# Altium PCB 2110V3.1.PcbDoc
Units mil, origin at the board's own origin, x right, y up, seen from the top; angles counter-clockwise.
Board outline 4100 x 2625 mil, 2 copper layers (Top Layer, Bottom Layer); 54 components, 23 nets, 148 pads, 12 vias.
Unrouted connection lines stored in the file: 2.
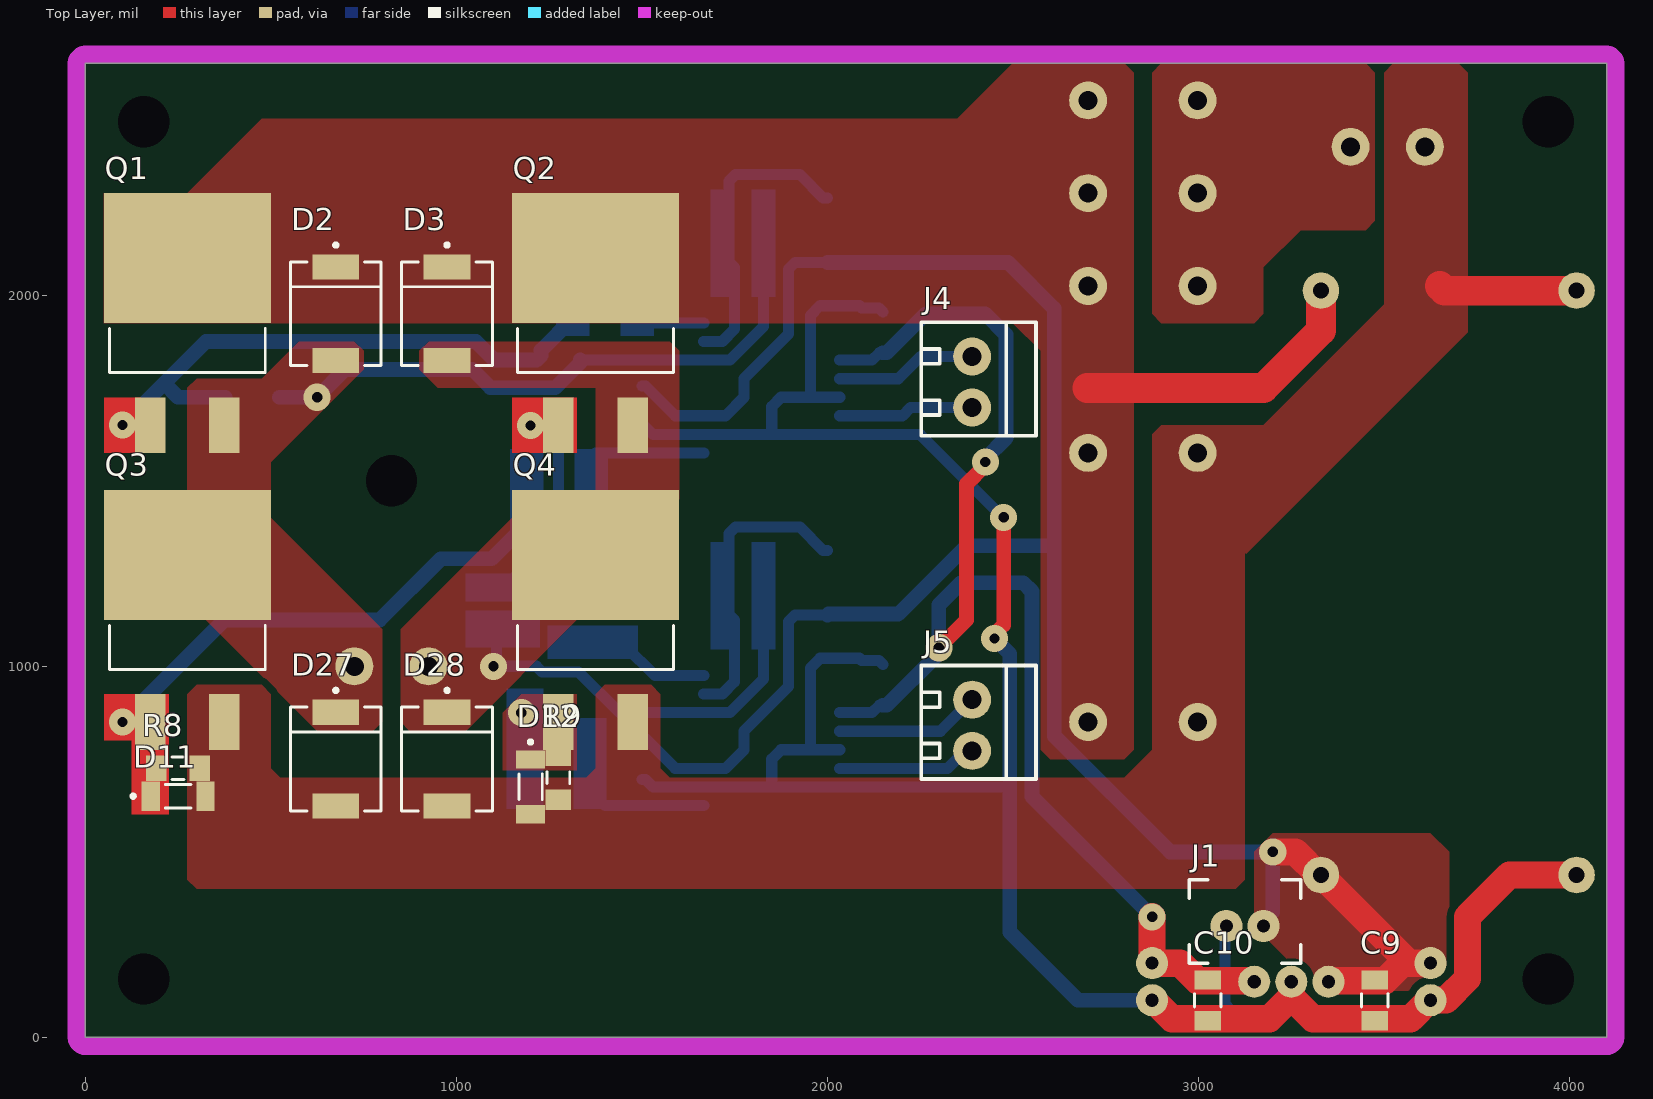
[diagram p0: Top Layer view]
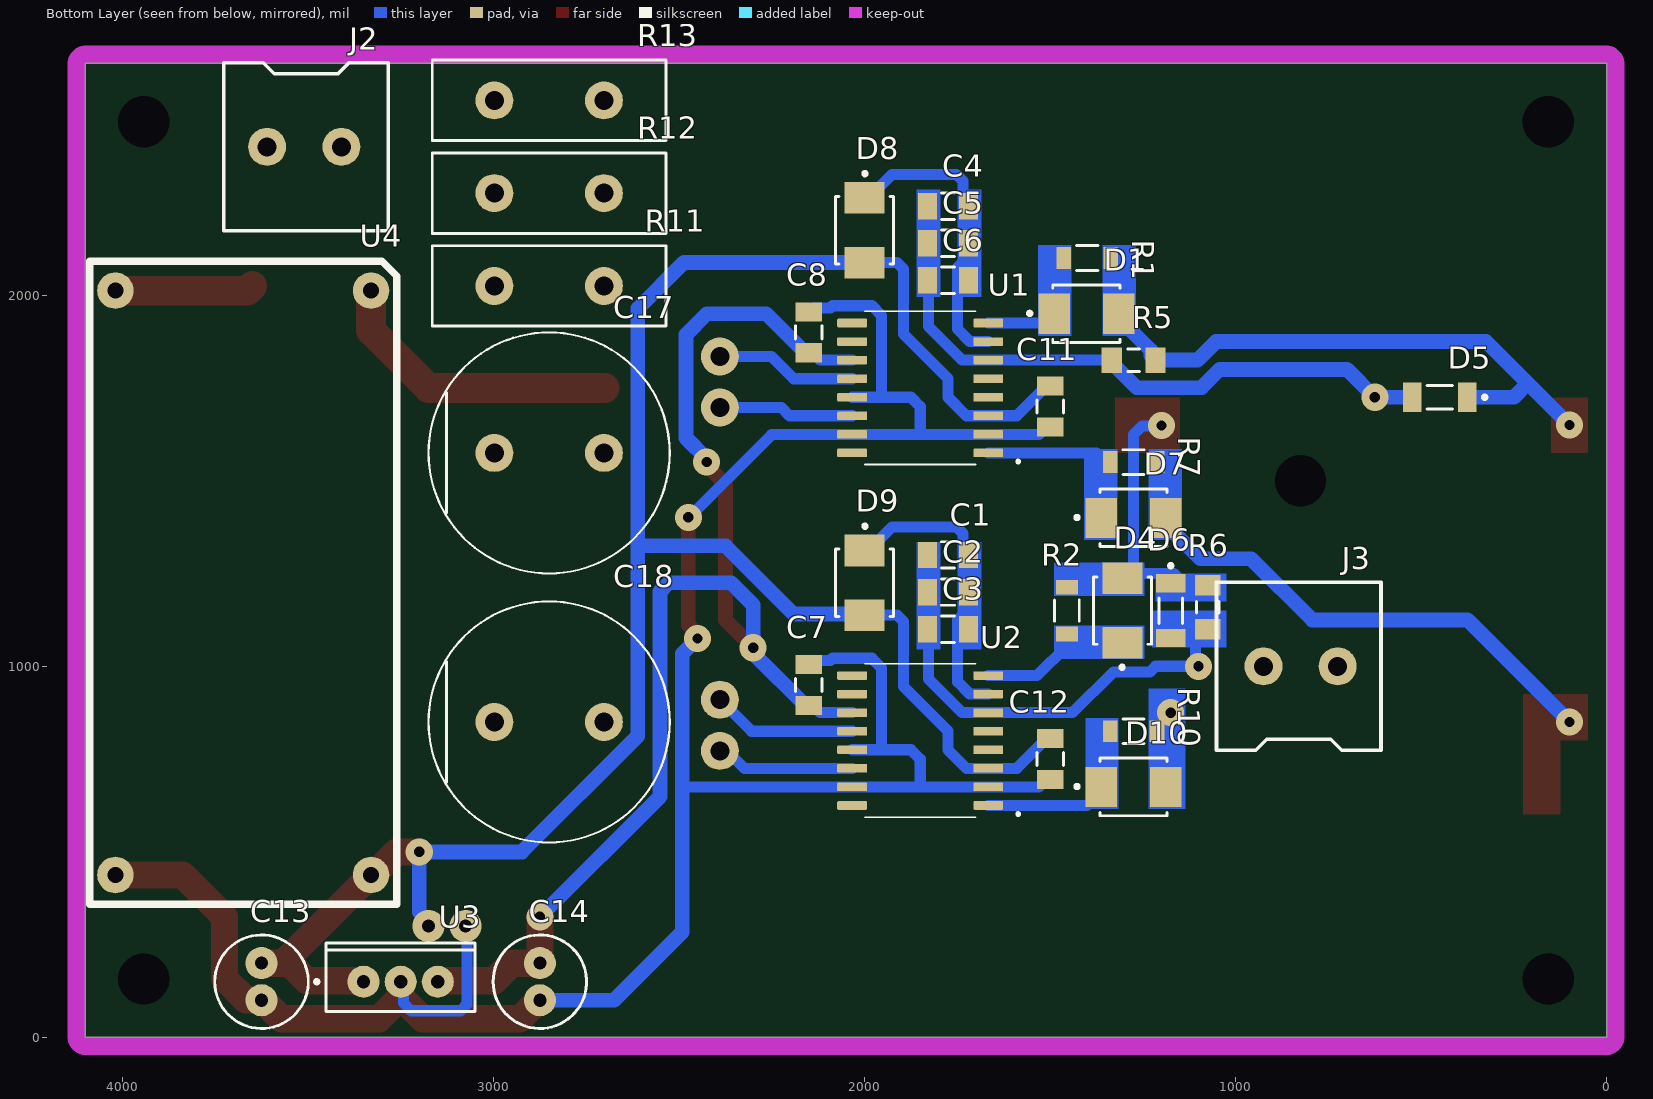
[diagram p1: Bottom Layer view, seen from below]

## Layer stack, top to bottom
Top Solder: solder mask 0.4, Solder Resist, Dk 3.5
Top Layer: signal copper 1.4
Dielectric 1: dielectric 12.6, FR-4, Dk 4.8
Bottom Layer: signal copper 1.4
Bottom Solder: solder mask 0.4, Solder Resist, Dk 3.5

## Board outline
0,0 0,2625 4100,2625 4100,0

## Design rules (kind name [scope] priority, off if disabled: settings)
Clearance [All] p1: gap=20 ignorepadtopadclearanceinfootprint=TRUE except(0: Arc-Hole Track-Hole SMDPad-Hole THPad-Hole Via-Hole Fill-Hole Poly-Hole Region-Hole Text-Hole)
Height [All] p1: minheight=0 maxheight=80000 prefheight=0
PolygonConnect [All] p1: connectstyle=Direct reliefconductorwidth=10 reliefentries=4 polygonreliefangle="90 Angle" airgapwidth=10
RoutingVias [All] p1: holewidth=28 width=50 viastyle="Through Hole" minholewidth=28 minwidth=50 maxholewidth=28 maxwidth=50
SolderMaskExpansion [All] p1: expansion=4 istentingtop=FALSE
Width [All] p1: maxlimit=600 minlimit=10 preferedwidth=30 minimp=50.000000 maximp=50.000000 favimp=50.000000
29 further rules are at their usual default settings.

## Components (designator, comment, footprint, x,y, rotation, side; value= is the part's Value field where it differs from the comment)
C1 "12061C474KAT2A" FP-1206-L_3_2_0_2-W_1_6_0-IPC_B 1775,1300 r0 bottom
C2 "12061C474KAT2A" FP-1206-L_3_2_0_2-W_1_6_0-IPC_B 1775,1200 r0 bottom
C3 "12061C474KAT2A" FP-1206-L_3_2_0_2-W_1_6_0-IPC_B 1775,1100 r0 bottom
C4 "12061C474KAT2A" FP-1206-L_3_2_0_2-W_1_6_0-IPC_B 1775,2240 r0 bottom
C5 "12061C474KAT2A" FP-1206-L_3_2_0_2-W_1_6_0-IPC_B 1775,2140 r0 bottom
C6 "12061C474KAT2A" FP-1206-L_3_2_0_2-W_1_6_0-IPC_B 1775,2040 r0 bottom
C7 "12065C104KAT2A" FP-1206-L_3_2_0_2-W_1_6_0-IPC_B 2150,950 r90 bottom
C8 "12065C104KAT2A" FP-1206-L_3_2_0_2-W_1_6_0-IPC_B 2150,1900 r90 bottom
C9 "12065C104KAT2A" FP-1206-L_3_2_0_2-W_1_6_0-IPC_B 3475,100 r270 top
C10 "12065C104KAT2A" FP-1206-L_3_2_0_2-W_1_6_0-IPC_B 3025,100 r270 top
C11 "12065C104KAT2A" FP-1206-L_3_2_0_2-W_1_6_0-IPC_B 1500,1700 r270 bottom
C12 "12065C104KAT2A" FP-1206-L_3_2_0_2-W_1_6_0-IPC_B 1500,750 r270 bottom
C13 "22 uF TH Electrolytic Capacitor" "22 uF TH Electrolytic Capacitor-Footprint-1" 3625,150 r270 bottom
C14 "22 uF TH Electrolytic Capacitor" "22 uF TH Electrolytic Capacitor-Footprint-1" 2875,150 r270 bottom
C17 "ECA1VM222" FP-RAD-TH-D_16_0_5-L_25_2-MFG 2850,1575 r180 bottom
C18 "ECA1VM222" FP-RAD-TH-D_16_0_5-L_25_2-MFG 2850,850 r180 bottom
D1 "MURS120T3G" FP-403A-03-MFG 1402.36,1950 r180 bottom
D2 "SS34-E3/57T" FP-95402-MFG 675,1950 r270 top
D3 "SS34-E3/57T" FP-95402-MFG 975,1950 r270 top
D4 "MURS120T3G" FP-403A-03-MFG 1305,1150 r90 bottom
D5 "TZMC3V3-GS08" FP-6_560-5005_01-4-MFG 450,1725 r0 bottom
D6 "TZMC3V3-GS08" FP-6_560-5005_01-4-MFG 1175,1150 r270 bottom
D7 "MURS120T3G" FP-403A-03-MFG 1275,1400 r180 bottom
D8 "MURS120T3G" FP-403A-03-MFG 2000,2175 r270 bottom
D9 "MURS120T3G" FP-403A-03-MFG 2000,1225 r270 bottom
D10 "MURS120T3G" FP-403A-03-MFG 1275,675 r180 bottom
D11 "TZMC3V3-GS08" FP-6_560-5005_01-4-MFG 250,650 r0 top
D12 "TZMC3V3-GS08" FP-6_560-5005_01-4-MFG 1200,675 r270 top
D27 "SS34-E3/57T" FP-95402-MFG 675,750 r270 top
D28 "SS34-E3/57T" FP-95402-MFG 975,750 r270 top
J1 "JST-2.54mm-2pin" "New footprint 1"#1 3125,300 r180 top
J2 "2 pin terminal klemens" "New footprint 1"#2 3509.84,2400 r0 bottom
J3 "2 pin terminal klemens" "New footprint 1"#2 825,1000 r180 bottom
J4 "KF350-P2" "New footprint 1"#3 2400,1775 r270 top
J5 "KF350-P2" "New footprint 1"#3 2400,850 r270 top
Q1 "IRF3205STRLPBF" FP-PG-TO263-3-MFG 275,1981.4 r0 top
Q2 "IRF3205STRLPBF" FP-PG-TO263-3-MFG 1375,1981.4 r0 top
Q3 "IRF3205STRLPBF" FP-PG-TO263-3-MFG 275,1181.4 r0 top
Q4 "IRF3205STRLPBF" FP-PG-TO263-3-MFG 1375,1181.4 r0 top
R1 "RC1206JR-0710RL" FP-RC1206-0_65-MFG 1400,2100 r180 bottom
R2 "RC1206JR-0710RL" FP-RC1206-0_65-MFG 1455,1150 r90 bottom
R5 "Resistor 1k +/-1% 1206 250 mW" RESC3116X70X50ML13T20 1275,1825 r0 bottom value=1k
R6 "Resistor 1k +/-1% 1206 250 mW" RESC3116X70X50ML13T20 1075,1159.06 r270 bottom value=1k
R7 "RC1206JR-0710RL" FP-RC1206-0_65-MFG 1275,1550 r180 bottom
R8 "Resistor 1k +/-1% 1206 250 mW" RESC3116X70X50ML13T20 250,725 r0 top value=1k
R9 "Resistor 1k +/-1% 1206 250 mW" RESC3116X70X50ML13T20 1275,700 r270 top value=1k
R10 "RC1206JR-0710RL" FP-RC1206-0_65-MFG 1275,825 r180 bottom
R11 "20mm Body 7.5mm pitch Thermistor" FP-NTPAD-MFG 2850,2025 r180 bottom
R12 "20mm Body 7.5mm pitch Thermistor" FP-NTPAD-MFG 2850,2275 r180 bottom
R13 "20mm Body 7.5mm pitch Thermistor" FP-NTPAD-MFG 2850,2525 r180 bottom
U1 "IR2110SPBF" IR2110SPBF-Footprint-1 1850,1750 r0 bottom
U2 "IR2110SPBF" IR2110SPBF-Footprint-1 1850,800 r0 bottom
U3 "LM7805CT" FAIR-TO-220-3 3250,150 r90 bottom
U4 "LM2596 Buck Converter Module" "LM2596 Buck Converter Module-Footprint-1" 3674.43,1225 r270 bottom

## Footprints (in the part's own frame and the unit in brackets; to place one, negate y for a bottom-side part, rotate by r counter-clockwise, add the part's x,y. Pads: shape width x height; smd on the part's side, far side on the other; paste and mask are expansions set on the pad)
"22 uF TH Electrolytic Capacitor-Footprint-1" [mm]
  round 2.2 hole 0.9 mask+0.051: 1(-1.27,0) 2(1.27,0)
  silkscreen extent -3.2,-3.2 3.2,3.2, body extent -3.15,-3.15 3.16,3.15, height 11.01
FAIR-TO-220-3 [mm] "FM, 3-Leads, Body 10.2x4.7mm, Pitch 2.54mm"
  round 2.2 hole 0.9 mask+0.051: 1(0,2.54) 2(0,0) 3(0,-2.54)
  silkscreen extent -2.04,-5.1 2.66,5.88, body extent -2.04,-5.1 2.66,5.1, height 18.95
FP-6_560-5005_01-4-MFG [mm]
  rect 1.25x2 smd paste+0 mask+0: 1(-1.875,0) 2(1.875,0)
  silkscreen extent -3.2,-0.8 0.87,0.8, body extent -1.76,-0.8 1.74,0.8, height 1.59
FP-403A-03-MFG [mil]
  rect 85x107.99 smd paste+0 mask+0: 1(-87.01,0) 2(87.01,0)
  silkscreen extent -157,-78 91,78, body extent -107,-70 107,70, height 97
FP-1206-L_3_2_0_2-W_1_6_0-IPC_B [mil]
  rect 51.36x71.11 smd paste+0 mask+0: 1(-55.15,0) 2(55.15,0)
  silkscreen extent -18,-36 18,36, body extent -63,-31 63,31, height 70
FP-95402-MFG [mm]
  rect 1.72x3.2 smd paste+0 mask+0: 1(-3.205,0) 2(3.205,0)
  silkscreen extent -4.82,-3.11 3.55,3.11, body extent -4.17,-3.21 4.17,3.21, height 0.25
FP-NTPAD-MFG [mm]
  round 2.6 hole 1.3 mask+0.051: 1(-3.75,0) 2(3.75,0)
  silkscreen extent -8,-2.75 8,2.75, body extent -8,-2.75 8,2.75, height 26
FP-PG-TO263-3-MFG [mm]
  rect 2.08x3.81 smd paste+0 mask+0: 1(-2.54,-8.417) 3(2.54,-8.417)
  rect 11.43x8.89 smd paste+0 mask+0: 2(0,3.013)
  silkscreen extent -5.34,-4.82 5.34,-1.81, body extent -5.81,-10.42 5.81,7.56, height 0.25
FP-RAD-TH-D_16_0_5-L_25_2-MFG [mm]
  round 2.6 hole 1.3 mask+0.051: 1(-3.75,0) 2(3.75,0)
  silkscreen extent -8.25,-8.25 8.25,8.25, body extent -8,-8.01 7.99,7.99, height 27
FP-RC1206-0_65-MFG [mm]
  rect 1x1.5 smd paste+0 mask+0: 1(-1.6,0) 2(1.6,0)
  silkscreen extent -0.72,-0.85 0.72,0.85, body extent -1.6,-0.79 1.62,0.81, height 0.57
IR2110SPBF-Footprint-1 [mm]
  rrect25% 2.05x0.59 smd: 1(-4.655,4.445) 2(-4.655,3.175) 3(-4.655,1.905) 4(-4.655,0.635) 5(-4.655,-0.635) 6(-4.655,-1.905) 7(-4.655,-3.175) 8(-4.655,-4.445) 9(4.655,-4.445) 10(4.655,-3.175) 11(4.655,-1.905) 12(4.655,-0.635) 13(4.655,0.635) 14(4.655,1.905) 15(4.655,3.175) 16(4.655,4.445)
  silkscreen extent -6.8,-5.25 3.8,5.25
"LM2596 Buck Converter Module-Footprint-1" [mm]
  round 2.5 hole 1.1 mask+0.051: 1(-20,8.75) 2(-20,-8.75) 3(20,8.75) 4(20,-8.75)
  silkscreen extent -22,-10.5 22,10.5, body extent -21.5,-10.5 21.5,10.5, height 13.82
"New footprint 1"#1 [mm]
  round 2.2 hole 0.9 mask+0.051: 1(-1.27,0) 2(1.27,0)
  silkscreen extent -3.81,-3.18 3.81,2.54, body extent -3.79,-3.15 3.75,2.55, height 7
"New footprint 1"#2 [mm]
  round 2.6 hole 1.3 mask+0.051: 1(-2.54,0) 2(2.54,0)
  silkscreen extent -5.75,-5.75 5.5,5.75, body extent -5.5,-5.6 5.23,5.6, height 19.34
"New footprint 1"#3 [mm]
  round 2.6 hole 1.3 mask+0.051: 1(-1.524,-0.254) 2(1.976,-0.254)
  silkscreen extent -3.86,-3.73 3.91,4.11, body extent -3.67,-3.6 3.73,3.9, height 10
RESC3116X70X50ML13T20 [mm] "Chip Resistor, 2-Leads, Body 3.25x1.65mm, IPC Low Density"
  rect 1.4x1.75 smd: 1(-1.5,0) 2(1.5,0)
  silkscreen extent -0.4,-0.77 0.4,0.77, body extent -1.63,-0.82 1.63,0.82, height 0.7

## Part data
C1 C2 C3 C4 C5 C6: library part CMP-000013-1, "1206 470 nF 100 V ±10 % Tolerance X7R Surface Mount Multilayer Ceramic Capacitor"
C7 C8 C9 C10 C11 C12: library part CMP-001-00084-1, "Ceramic capacitor SMD-1206 100nF /50V X7R# K +-10%, AVX, RoHS, /4000 reel/"
C13 C14: library part CMP-000003-2
C17 C18: library part CMP-000011-3, "Cap Aluminum 2200uF 35V 20% (16 X 25mm) Radial 7.5mm 1250mA 2000h 85°C Bulk"
D1 D4 D7 D8 D9 D10: library part CMP-004-00033-1, "VR=200V IF=2A Trr=35ns"
D2 D3 D27 D28: library part CMP-000005-2, "DIODE SCHOTTKY 40V 3A DO214AB"
D5 D6 D11 D12: library part CMP-000009-1, "DIODE ZENER 3.3V 500MW SOD80"
J1: library part CMP-000001-1, "2 pin konnektör"
J2 J3: library part CMP-002-00072-2, "2 pin terminal klemens pin aralığı 200 mil"
J4 J5: library part CMP-002-00078-2, "3.5mm mini klemens"
Q1 Q2 Q3 Q4: library part CMP-013-00038-1, "MOSFET N-CH 55V 110A D2PAK"
R1 R2 R7 R10: library part CMP-000008-1, "Res General Purpose Thick Film 1206 10 Ohm 5% 1/4W ±200ppm/°C Molded SMD Paper T/R"
R5 R6 R8 R9: library part CMP-009-00011-5, "Chip Resistor, 1 KOhm, +/- 1%, 0.25 W, -55 to 155 degC, 1206 (3216 Metric)", Case/Package=1206, Max Operating Temperature=155°C, Min Operating Temperature=-55°C, Power=250mW, Tolerance=1%, Voltage Rating=200V, Mounting Technology=SM, Pins=2, RoHS Compliant=True
R11 R12 R13: library part CMP-009-00184-2
U1 U2: library part CMP-000016-1, "500 V high-side and low-side gate driver IC with shutdown, SOIC 16W, RoHS"
U3: library part CMP-000017-2, "LM78XX Series 5 V Fixed Output 1 A 3-Terminal LDO Voltage Regulator - TO-220"
U4: library part CMP-00000-1

## Free pads (board coordinates)
  round 60 hole 137.8: 1(157.48,157.48) 1(157.48,2467.52) 1(825,1500) 1(3942.52,157.48) 1(3942.52,2467.52)

## Via types
v1: diameter 72.87, hole 27.56, Top Layer to Bottom Layer, 12 vias

## Nets (pads, with @x,y where several pads share a name; then routed paths per layer and width w, separated by ;. In a path a pad name is that pad's centre, name@x,y a point inside that pad or via, vN(x,y) a via of type N, cw(c..) or ccw(c..) an arc to the next point about the centre after c; other vN are vias at no path point)
+5: C7.1 C8.1 C10.1 C14.1 U1.11 U2.11 U3.3 | length 3622.1
  Top Layer w40: v1(2300,1050) 2375,1125 2375,1491.1 2425.51,1541.62 v1(2425.51,1550.51)
  Top Layer w73: v1(2875,325) C14.1 2875.19,199.81 2950.51,199.81 2997.71,152.6 3147.4,152.6 U3.3
  Bottom Layer w30: U2.11 2120.28,875 2140.13,894.85 C7.1 ; U1.11 2120.28,1825 2140.13,1844.85 C8.1
  Bottom Layer w40: C7.1 2159.87,894.85 2293.71,1028.69 2293.71,1043.71 v1(2300,1050) 2300,1165.15 2359.85,1225 2527.75,1225 2551.18,1201.57 2551.18,648.82 v1(2875,325) ; C8.1 2159.87,1844.85 2265.02,1950 2425,1950 2481.18,1893.82 2481.18,1615.08 2425.51,1559.41 v1(2425.51,1550.51)
+12: C9.1 C11.1 C12.1 C13.1 D8.2 D9.2 J1.1 U1.3 U2.3 U3.1 U4.3 | length 5883.9
  Top Layer w73: v1(3200,500) 3260.66,500 3323.06,437.6 U4.3 3549.49,218.05 3549.49,199.81 ; U3.1 3352.6,152.6 3502.29,152.6 3549.49,199.81 ; C13.1 3624.81,199.81 3549.49,199.81
  Bottom Layer w30: C12.1 1509.87,805.15 1590.02,725 U2.3 1725,725 1775,775 1775,825 1895.3,945.3 1895.3,1120.42 1912.87,1137.99 D9.2 ; C11.1 1509.87,1755.15 1590.02,1675 U1.3 1725,1675 1775,1725 1775,1775 1895.3,1895.3 1895.3,2070.42 1912.87,2087.99 D8.2
  Bottom Layer w40: D9.2 2002.57,1140.56 2190.56,1140.56 2375,1325 2611.18,1325 ; D8.2 2487.01,2087.99 2611.18,1963.82 2611.18,1325 ; J1.1 3175,312.61 3200,337.61 v1(3200,500) 2923.41,500 2611.18,812.23 2611.18,1325
BAT: J2.1 R11.1 R12.1 R13.1
GND: C7.2 C8.2 C9.2 C10.2 C11.2 C12.2 C13.2 C14.2 C17.1 C18.1 D11.2 D12.2 D27.2 D28.2 J1.2 J2.2 pad.1@157.48,2467.52 Q3.3 Q4.3 R8.2 R9.2 U1.2 U1.13 U1.15 U2.2 U2.13 U2.15 U3.2 U4.2 U4.4 | length 7414.8
  Top Layer w40: v1(2450,1075) 2450,1086.6 2475,1111.6 v1(2475,1401.44)
  Top Layer w73: C14.2 2878.68,100 2928.49,50.19 3191.34,50.19 U3.2@3249.81,108.66 ; U3.2 3250.19,149.81 3250.19,108.66 3308.66,50.19 3571.51,50.19 3621.32,100 C13.2 3625.19,100.19 3666.34,100.19 3724.81,158.66 3724.81,324.81 3837.6,437.6 U4.4
  Top Layer w80: 3650,2025 3662.6,2012.4 U4.2
  Bottom Layer w30: C12.2 1509.87,694.85 1529.72,675 U2.2 1850,675 ; C11.2 1509.87,1644.85 1529.72,1625 U1.2 1850,1625 ; U2.13 1954.13,775 ; U1.13 1954.13,1725 ; C7.2 2139.32,1015.83 2092.2,1015.83 2086.42,1021.61 1980.12,1021.61 1954.13,995.63 1954.13,775 ; C8.2 2139.32,1965.83 2092.2,1965.83 2086.42,1971.61 1980.12,1971.61 1954.13,1945.63 1954.13,1725 ; 2475,675 U2.15 1850,675 ; v1(2475,1401.44) 2473.56,1401.44 2250,1625 U1.15 1850,1625 ; J1.2 3071.69,296.69 3071.69,89.27 3089.27,71.69 3221.69,71.69 3242.56,92.56 3242.56,142.56 U3.2 ; 1850,675 1850,750 1875,775 1954.13,775 ; 1850,1625 1850,1700 1875,1725 1954.13,1725
  Bottom Layer w40: v1(2450,1075) 2491.18,1033.82 2491.18,675 2491.18,283.82 2675,100 C14.2
HG1: D1.2 D5.1 Q1.1 R1.2 R5.1 | length 1575.2
  Bottom Layer w40: v1(100,1650) 212.5,1762.5 ; D5.1 250,1725 212.5,1762.5 ; D1.2 1315.35,1938.5 1228.5,1851.65 1228.5,1837.56 R5.1 1102.78,1825 1052.78,1875 325,1875 212.5,1762.5
HG2: D4.2 D6.1 Q2.1 R2.2 R6.1 | length 642.2
  Bottom Layer w30: 1125,1232.87 D6.1@1139.76,1232.87 ; D6.1@1139.76,1223.82 1165.94,1250 1275,1250 D4.2@1292.01,1250 ; v1(1200,1648.56) 1201.15,1647.42 1252.58,1647.42 1275,1625 D4.2@1275,1264.51 ; D4.2@1290.76,1248.75 1302.5,1237.01 D4.2
HIN1: J4.1 U1.12 | length 381.6
  Bottom Layer w30: U1.12 2190.88,1775 2250.88,1835 J4.1
HIN2: J5.1 U2.12 | length 391.9
  Bottom Layer w30: U2.12 2305,825 J5.1
HO1: D1.1 R1.1 U1.8 | length 187.7
  Bottom Layer w30: D1.1 1514.37,1925 U1.8
HO2: D4.1 R2.1 U2.8 | length 276.9
  Bottom Layer w30: R2.1 1455,1055 1535,975 U2.8
LG1: D7.2 D11.1 Q3.1 R7.2 R8.1 | length 1325.8
  Bottom Layer w40: v1(100,850) 375,1125 793.43,1125 958.43,1290 1095,1290 1187.99,1382.99 D7.2
LG2: D10.2 D12.1 Q4.1 R9.1 R10.2
  other v1: 1175,875
LIN1: J4.2 U1.14 | length 365.9
  Bottom Layer w30: U1.14 2201.73,1675 2223.93,1697.2 J4.2
LIN2: J5.2 U2.14 | length 376.3
  Bottom Layer w30: U2.14 2323.21,725 2370.42,772.2 J5.2
LO1: D7.1 R7.1 U1.1 | length 342
  Bottom Layer w30: R7.1 1355,1550 1375,1570 1375,1575 U1.1
LO2: D10.1 R10.1 U2.1 | length 332.2
  Bottom Layer w30: D10.1 1362.01,663.5 1400.51,625 U2.1
NetC28_1: 
NetC29_1: 
VB1: C4.1 C5.1 C6.1 D8.1 U1.7 | length 844.1
  Bottom Layer w30: U1.7 1716.5,1875 1750,1908.5 1750,2075 1725,2100 1719.85,2094.85 C6.1 ; C5.1@1717.5,2140 1717.5,2240 1735,2257.5 1735,2307.43 1752.57,2325 1925.51,2325 1988.5,2262.01 D8.1 ; C4.1 C4.1@1719.85,2249.87
VB2: C1.1 C2.1 C3.1 D9.1 U2.7 | length 844.1
  Bottom Layer w30: U2.7 1716.5,925 1750,958.5 1750,1125 1725,1150 1719.85,1144.85 C3.1@1719.85,1090 ; C2.1@1717.5,1190 1717.5,1290 1735,1307.5 1735,1357.43 1752.57,1375 1925.51,1375 1988.5,1312.01 D9.1 ; C1.1@1719.85,1290 C1.1@1719.85,1299.87
VCC: C17.2 C18.2 D2.1 D3.1 Q1.2 Q2.2 R11.2 R12.2 R13.2 U4.1 | length 801.6
  Top Layer w80: 2700,1750 3175,1750 3329.94,1904.94 U4.1
VS1: C4.2 C5.2 C6.2 D2.2 D5.2 D27.1 J3.2 Q1.3 Q3.2 R5.2 U1.6 | length 1553.3
  Bottom Layer w30: R5.2 U1.6 1737.21,1825 1827.8,1915.59 1827.8,2037.65 C6.2
  Bottom Layer w40: D5.2 v1(625,1725) 700,1800 1042.93,1800 1092.38,1750.55 1266.5,1750.55 1334.06,1818.11 R5.2
VS2: C1.2 C2.2 C3.2 D3.2 D6.2 D28.1 J3.1 Q2.3 Q4.2 R6.2 U2.6 | length 1033.2
  Bottom Layer w30: 1125,1076.18 1117.81,1076.18 1108.2,1066.57 1108.2,1008.2 v1(1100,1000) 1215.5,1000 1230.5,985 1329.5,985 1439.5,875 U2.6 1737.21,875 1827.8,965.59 1827.8,1087.65 C3.2@1830.15,1090
pads on no net: U1.4 U1.5 U1.9 U1.10 U1.16 U2.4 U2.5 U2.9 U2.10 U2.16

## Polygon pours and split planes (outlines as drawn)
+12 on Top Layer "+12_L01_P012" (solid, pour order 12): 3150,500 3150,300 3325,125 3600,125 3675,200 3675,500 3625,550 3200,550
GND on Top Layer "GND_L01_P011" (solid, pour order 11): 3000,1650 3175,1650 3500,1975 3500,2600 3525,2625 3700,2625 3725,2600 3725,1900 3125,1300
VCC on Top Layer "VCC_L01_P001" (solid, pour order 1): 2575,775 2600,750 2800,750 2825,775 2825,2600 2800,2625 75,2625 50,2600 50,1925 2500,1925 2575,1850
LG2 on Top Layer "LG2_L01_P010" (solid, pour order 10): 1175,925 1125,875 1125,675 1325,675 1325,925
VS2 on Top Layer "VS2_L01_P009" (solid, pour order 9): 1025,825 1325,1125 1325,1225 1150,1400 850,1100 850,850 875,825
VS2 on Top Layer "VS2_L01_P002" (solid, pour order 2): 1400,1775 1375,1750 1375,1450 1600,1450 1600,1750 1575,1775
VS1 on Top Layer "VS1_L01_P003" (solid, pour order 3): 300,1775 275,1750 275,1450 500,1450 500,1750 475,1775
VS1 on Top Layer "VS1_L01_P004" (solid, pour order 4): 750,1850 725,1875 575,1875 475,1775 475,1550 500,1550 750,1800
VS2 on Top Layer "VS2_L01_P005" (solid, pour order 5): 925,1875 900,1850 900,1800 950,1750 1600,1750 1600,1850 1575,1875
GND on Top Layer "GND_L01_P007" (solid, pour order 7): 1375,925 1400,950 1525,950 1550,925 1550,725 1600,675 1325,675 1375,725
VS1 on Top Layer "VS1_L01_P008" (solid, pour order 8): 625,825 325,1125 325,1225 500,1400 800,1100 800,850 775,825
GND on Top Layer "GND_L01_P006" (solid, pour order 6): 275,925 300,950 475,950 500,925 500,725 525,700 2800,700 2875,775 2875,1625 2900,1650 3100,1650 3125,1625 3125,425 3100,400 300,400 275,425 275,825
BAT on Top Layer "BAT_L01_P000" (solid, pour order 0): 3475,2600 3450,2625 2900,2625 2875,2600 2875,1950 2900,1925 3150,1925 3175,1950 3175,2075 3275,2175 3450,2175 3475,2200

## Keep-outs
Keep-Out Layer:
  lines w47.24: -23.62,0 ccw(c0,0) 0,-23.62 ; -23.62,0 ccw(c0,0) 0,-23.62 ; -23.62,0 -23.62,2625 ; -23.62,2625 cw(c0,2625) 0,2648.62 ; -23.62,2625 cw(c0,2625) 0,2648.62 ; 0,-23.62 4100,-23.62 ; 0,2648.62 4100,2648.62 ; 4100,-23.62 ccw(c4100,0) 4123.62,0 ; 4100,-23.62 ccw(c4100,0) 4123.62,0 ; 4100,2648.62 cw(c4100,2625) 4123.62,2625 ; 4100,2648.62 cw(c4100,2625) 4123.62,2625 ; 4123.62,0 4123.62,2625

## Other copper
Top Layer:
  rectangle net HG1: 50,1575 150,1725
  rectangle net LG1: 50,800 150,925
  rectangle net LG1: 125,600 225,925
  rectangle net HG2: 1150,1575 1325,1725
  pour cut-out: 475,2475 2350,2475 2500,2625 475,2625
  pour cut-out: 475,2625 475,2475 275,2275 50,2275 50,2625
Bottom Layer:
  rectangle net VS2: 1025,1050 1225,1150
  rectangle net HG2: 1025,1175 1215.94,1250
  rectangle net HG1: 1268.35,1890 1358.35,2135
  rectangle net HO1: 1442.36,1890 1532.36,2135
  region net HG2: 1490,1190 1490,1280 1245,1280 1245,1190
  region net LG1: 1235,1585 1145,1585 1145,1340 1235,1340
  region net LO1: 1409.02,1585 1319.02,1585 1319.02,1340 1409.02,1340
  region net HO2: 1245,1110 1245,1020 1490,1020 1490,1110
  region net LG2: 1235,940 1135,940 1135,615 1235,615
  rectangle net LO2: 1315,615 1405,860
  region net VB2: 1750,1335 1685,1335 1685,1045 1750,1045
  region net VS2: 1860.3,1335 1795.3,1335 1795.3,1045 1860.3,1045
  region net VS1: 1860.3,2285 1795.3,2285 1795.3,1995 1860.3,1995
  region net VB1: 1750,2285 1685,2285 1685,1995 1750,1995

## Silkscreen, mask and mechanical layers (free items; w line width, h text height)
Drill Drawing:
  the board outline again, w10